# Allegro board BeagleBone-Breadboard-RevA1-allegro.brd
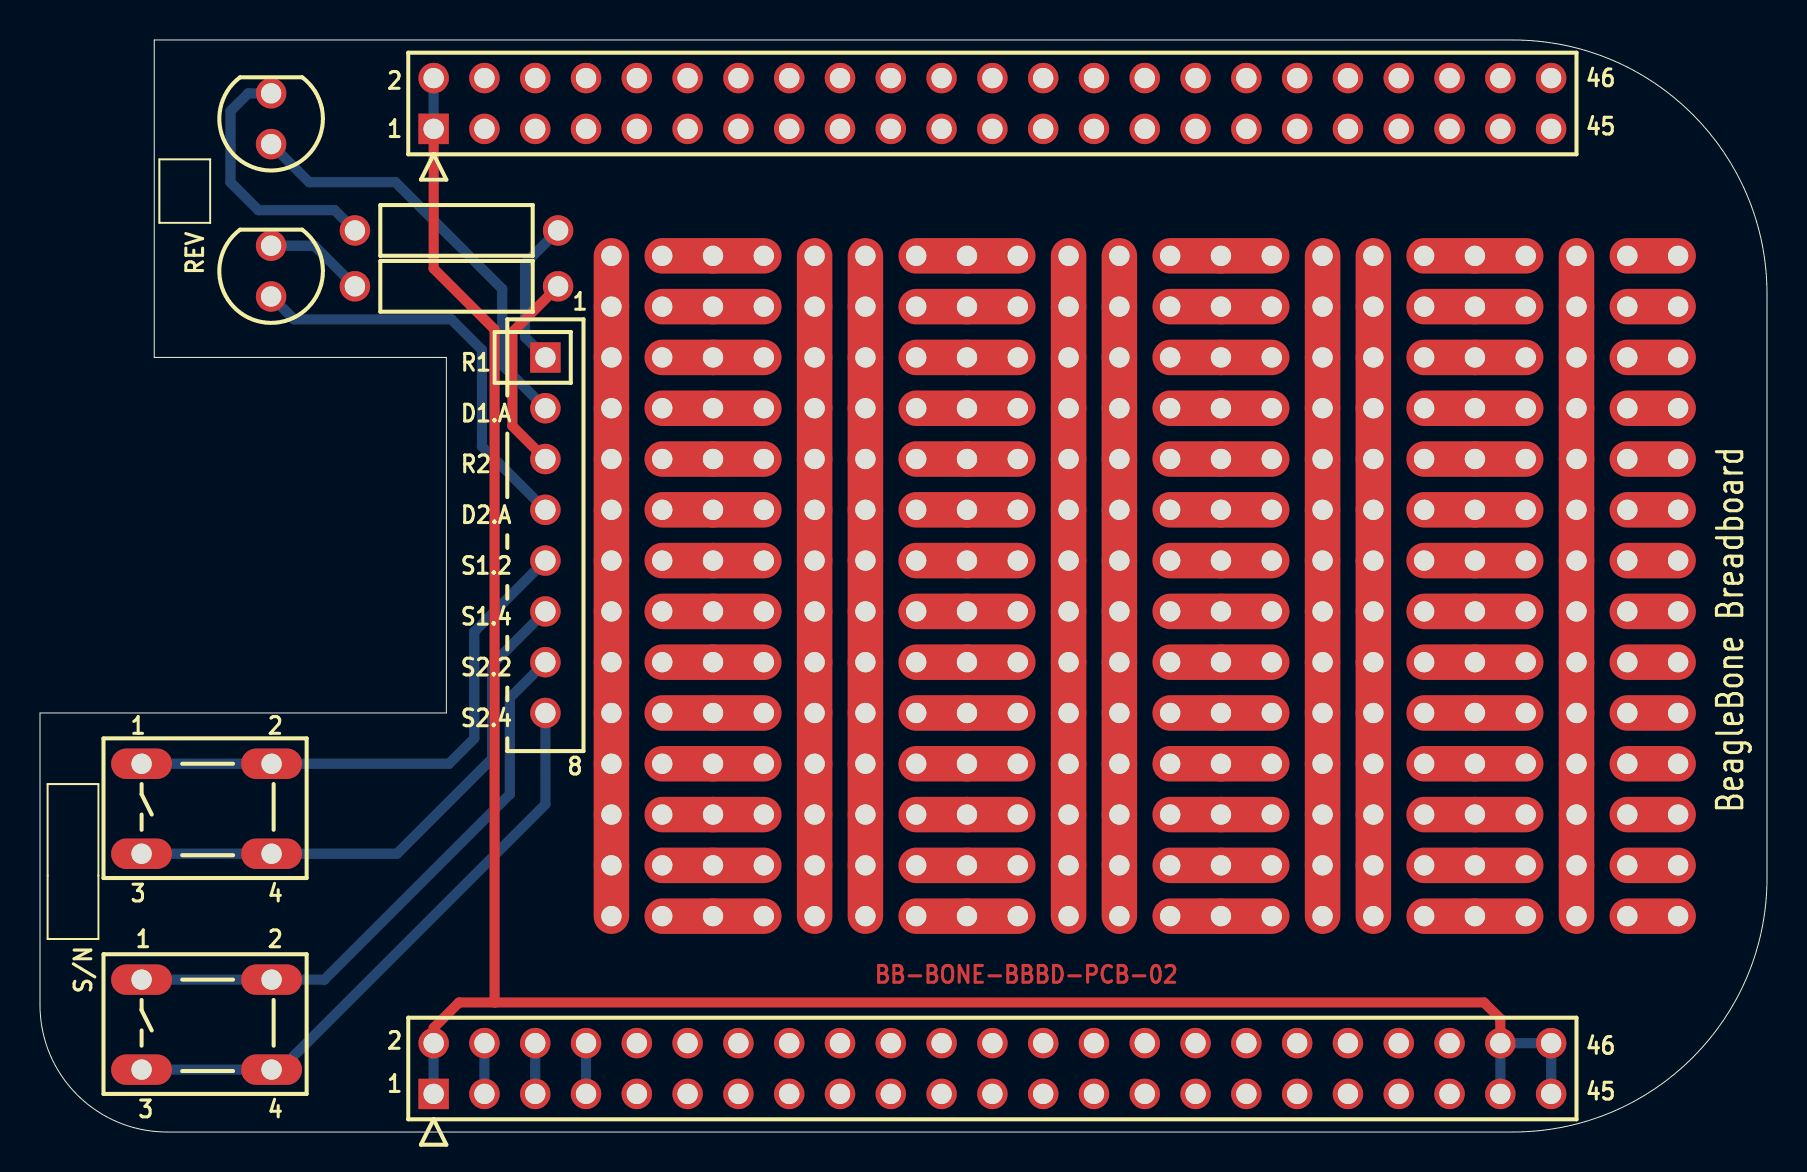
[diagram p0: board, top side]
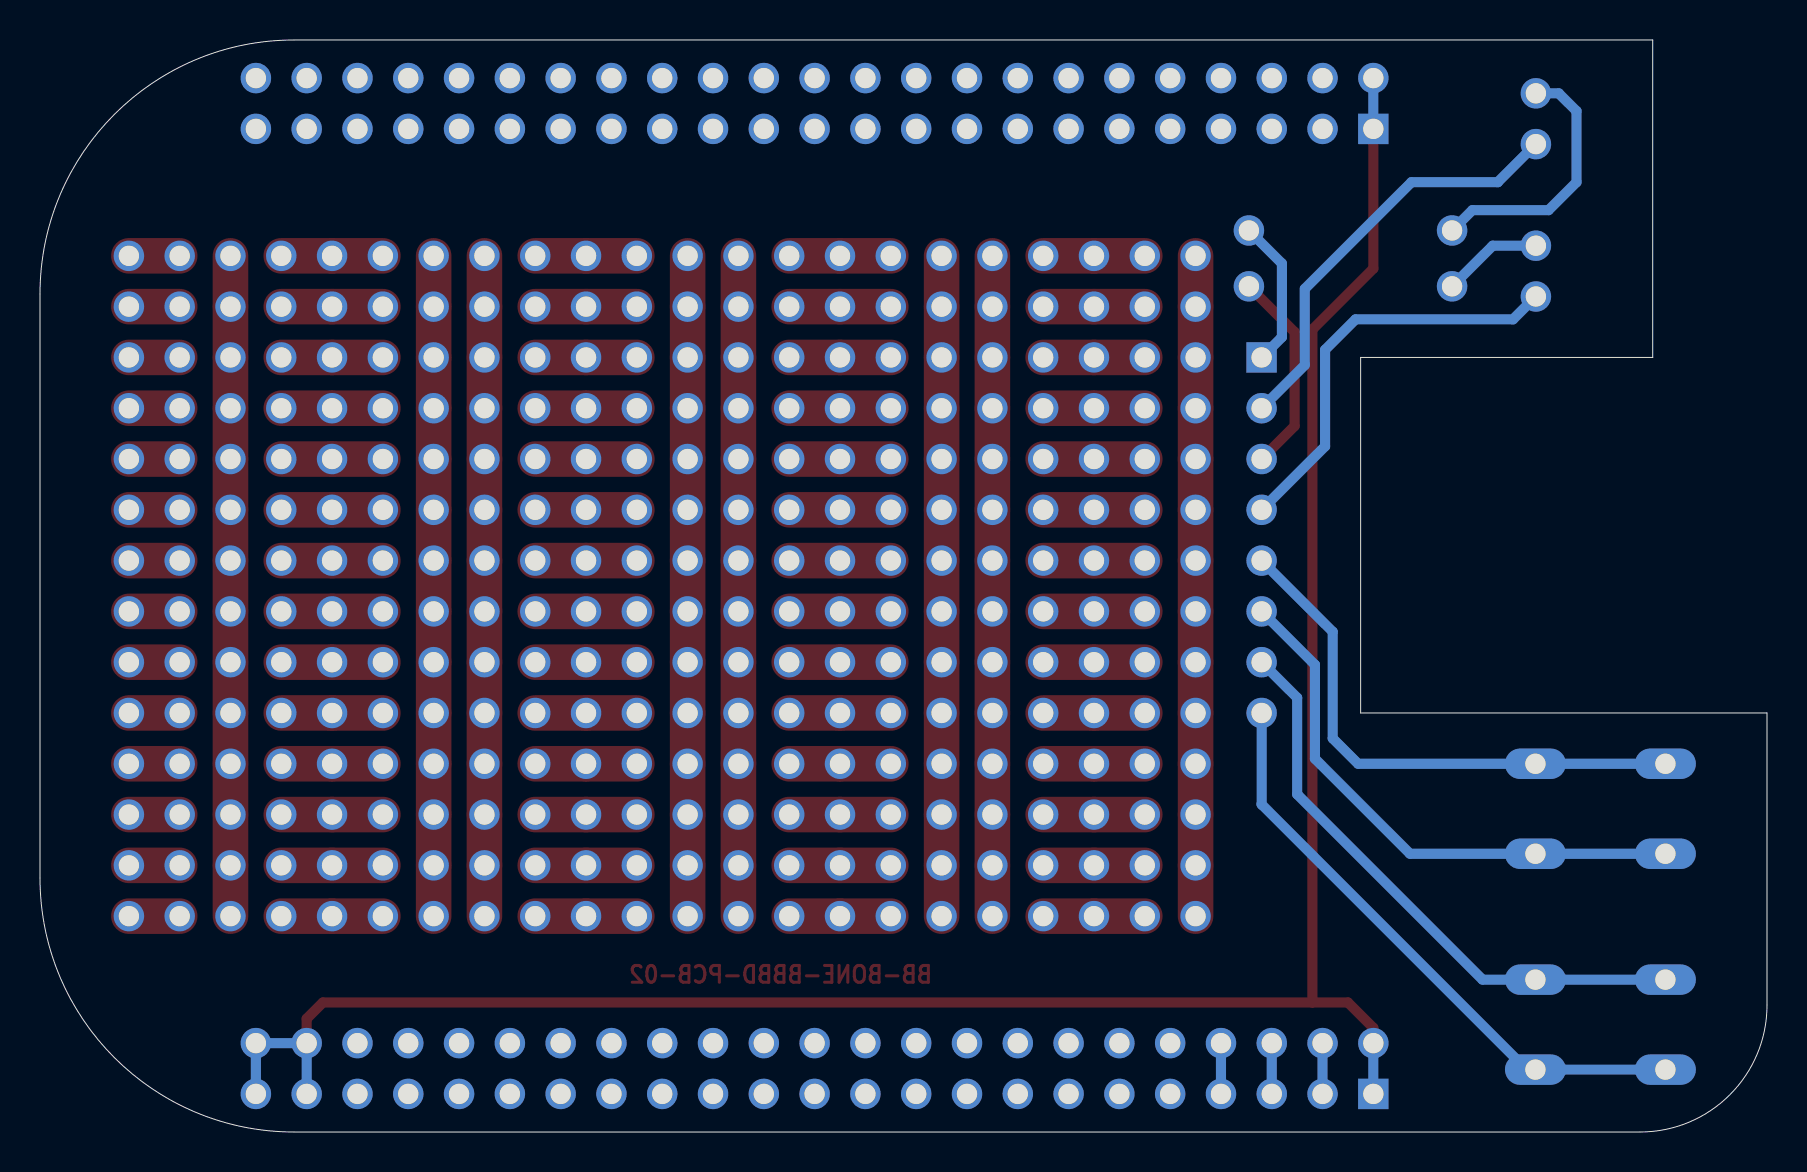
[diagram p1: board, bottom side, seen from below]

Outline 86.36 x 54.61 mm; copper layers: TOP, BOTTOM. Coordinates in mm from the lower left corner of the outline.

## Placement (name value [footprint] x y rotation side)
D1  LED  [LEDS]  11.56 50.67 90 top
D2  LED  [LEDS]  11.56 43.05 90 top
NOREF  -  []  -358.14 -231.14 0 top
NOREF#2  -  []  0 0 0 top
P1  FEMALE HEADER 2x23  [2X23_HDR_FEMALE]  19.68 50.16 180 top
P2  FEMALE HEADER 2x23  [2X23_HDR_FEMALE]  19.68 1.91 180 top
P3  8-PIN HEADER  [8_PIN_HDR_FEMALE]  25.27 38.73 90 top
R1  470  [RESISTOR]  20.83 45.09 180 top
R2  470  [RESISTOR]  20.83 42.29 180 top
S1  SW DIP-2  [BUTTONS]  5.08 18.41 0 top
S2  SW DIP-2  [BUTTONS]  5.08 7.62 0 top
TH1  CONN SOCKET 14x2  [2X14HEADER]  33.66 27.3 0 top
TH2  CONN SOCKET 14x2  [2X14HEADER]  46.35 27.3 0 top
TH3  CONN SOCKET 14x2  [2X14HEADER]  59.05 27.3 0 top
TH4  CONN SOCKET 14x2  [2X14HEADER]  71.75 27.3 0 top
TH5  CONN SOCKET 21x2  [3X14HEADER]  33.66 27.3 0 top
TH6  CONN SOCKET 21x2  [3X14HEADER]  46.35 27.3 0 top
TH7  CONN SOCKET 21x2  [3X14HEADER]  59.05 27.3 0 top
TH8  CONN SOCKET 21x2  [3X14HEADER]  71.75 27.3 0 top
TH9  CONN SOCKET 14  [14HEADER]  79.38 27.3 0 top
TH10  CONN SOCKET 14  [14HEADER]  81.92 27.3 0 top

## Library data of the parts
D1 D2 = LED
P1 P2 = FEMALE HEADER 2x23
P3 = 8-PIN HEADER
R1 R2 = R
S1 S2 = SW DIP-2
TH1-TH4 = CONN SOCKET 14x2
TH5-TH8 = CONN SOCKET 21x2
TH9 TH10 = CONN SOCKET 14

## Footprints (pads in the part's own frame, mm; a bottom-side part is the same pattern mirrored in y, then rotated)
2X14HEADER
  round 1.524 hole 1.016: 1(-5.08,16.51) 2(5.08,16.51) 3(-5.08,13.97) 4(5.08,13.97) 5(-5.08,11.43) 6(5.08,11.43) 7(-5.08,8.89) 8(5.08,8.89) 9(-5.08,6.35) 10(5.08,6.35) 11(-5.08,3.81) 12(5.08,3.81) 13(-5.08,1.27) 14(5.08,1.27) 15(-5.08,-1.27) 16(5.08,-1.27) 17(-5.08,-3.81) 18(5.08,-3.81) 19(-5.08,-6.35) 20(5.08,-6.35) 21(-5.08,-8.89) 22(5.08,-8.89) 23(-5.08,-11.43) 24(5.08,-11.43) 25(-5.08,-13.97) 26(5.08,-13.97) 27(-5.08,-16.51) 28(5.08,-16.51)
2X23_HDR_FEMALE
  rect 1.524x1.524 hole 1.016: 1(0,0)
  round 1.524 hole 1.016: 2(0,-2.54) 3(-2.54,0) 4(-2.54,-2.54) 5(-5.08,0) 6(-5.08,-2.54) 7(-7.62,0) 8(-7.62,-2.54) 9(-10.16,0) 10(-10.16,-2.54) 11(-12.7,0) 12(-12.7,-2.54) 13(-15.24,0) 14(-15.24,-2.54) 15(-17.78,0) 16(-17.78,-2.54) 17(-20.32,0) 18(-20.32,-2.54) 19(-22.86,0) 20(-22.86,-2.54) 21(-25.4,0) 22(-25.4,-2.54) 23(-27.94,0) 24(-27.94,-2.54) 25(-30.48,0) 26(-30.48,-2.54) 27(-33.02,0) 28(-33.02,-2.54) 29(-35.56,0) 30(-35.56,-2.54) 31(-38.1,0) 32(-38.1,-2.54) 33(-40.64,0) 34(-40.64,-2.54) 35(-43.18,0) 36(-43.18,-2.54) 37(-45.72,0) 38(-45.72,-2.54) 39(-48.26,0) 40(-48.26,-2.54) 41(-50.8,0) 42(-50.8,-2.54) 43(-53.34,0) 44(-53.34,-2.54) 45(-55.88,0) 46(-55.88,-2.54)
3X14HEADER
  round 1.524 hole 1.016: 1(-2.54,16.51) 2(0,16.51) 3(2.54,16.51) 4(-2.54,13.97) 5(0,13.97) 6(2.54,13.97) 7(-2.54,11.43) 8(0,11.43) 9(2.54,11.43) 10(-2.54,8.89) 11(0,8.89) 12(2.54,8.89) 13(-2.54,6.35) 14(0,6.35) 15(2.54,6.35) 16(-2.54,3.81) 17(0,3.81) 18(2.54,3.81) 19(-2.54,1.27) 20(0,1.27) 21(2.54,1.27) 22(-2.54,-1.27) 23(0,-1.27) 24(2.54,-1.27) 25(-2.54,-3.81) 26(0,-3.81) 27(2.54,-3.81) 28(-2.54,-6.35) 29(0,-6.35) 30(2.54,-6.35) 31(-2.54,-8.89) 32(0,-8.89) 33(2.54,-8.89) 34(-2.54,-11.43) 35(0,-11.43) 36(2.54,-11.43) 37(-2.54,-13.97) 38(0,-13.97) 39(2.54,-13.97) 40(-2.54,-16.51) 41(0,-16.51) 42(2.54,-16.51)
8_PIN_HDR_FEMALE
  rect 1.524x1.524 hole 1.016: 1(0,0)
  round 1.524 hole 1.016: 2(-2.54,0) 3(-5.08,0) 4(-7.62,0) 5(-10.16,0) 6(-12.7,0) 7(-15.24,0) 8(-17.78,0)
14HEADER
  round 1.524 hole 1.016: 1(0,16.51) 2(0,13.97) 3(0,11.43) 4(0,8.89) 5(0,6.35) 6(0,3.81) 7(0,1.27) 8(0,-1.27) 9(0,-3.81) 10(0,-6.35) 11(0,-8.89) 12(0,-11.43) 13(0,-13.97) 14(0,-16.51)
BUTTONS
  oval 3.048x1.524 hole 1.016: 1(0,0) 2(6.5,0) 3(0,-4.5) 4(6.5,-4.5)
LEDS
  round 1.524 hole 1.016: 1(-1.27,0) 2(1.27,0)
RESISTOR
  round 1.524 hole 1.016: 1(-5.08,0) 2(5.08,0)

## Nets
AGND: P2.34
DGND: P1.1 P1.2 P2.1 P2.2 P2.43 P2.44 P2.45 P2.46
VDD_3V3EXP: P2.3 P2.4
VDD_5V: P2.5 P2.6
VDD_ADC: P2.32
AIN0: P2.39
AIN1: P2.40
AIN2: P2.37
AIN3: P2.38
AIN4: P2.33
AIN5: P2.36
AIN6: P2.35
CLKOUT2: P2.41
EHRPWM1A: P2.14
EHRPWM1B: P2.16
EHRPWM2A: P1.19
EHRPWM2B: P1.13
GPIO0_7: P2.42
GPIO1_0: P1.25
GPIO1_1: P1.24
GPIO1_2: P1.5
GPIO1_3: P1.6
GPIO1_4: P1.23
GPIO1_5: P1.22
GPIO1_6: P1.3
GPIO1_7: P1.4
GPIO1_12: P1.12
GPIO1_13: P1.11
GPIO1_14: P1.16
GPIO1_15: P1.15
GPIO1_26: P1.14
GPIO1_27: P1.17
GPIO1_28: P2.12
GPIO1_29: P1.26
GPIO1_30: P1.21
GPIO1_31: P1.20
GPIO2_1: P1.18
GPIO2_6: P1.45
GPIO2_7: P1.46
GPIO2_8: P1.43
GPIO2_9: P1.44
GPIO2_10: P1.41
GPIO2_11: P1.42
GPIO2_13: P1.40
GPIO2_22: P1.27
GPIO2_23: P1.29
GPIO2_24: P1.28
GPIO2_25: P1.30
GPIO3_19: P2.27
GPIO3_21: P2.25
GPIO_12: P1.39
I2C1_SCL: P2.17
I2C1_SDA: P2.18
I2C2_SCL: P2.19
I2C2_SDA: P2.20
N$40: P1.38
PWR_BUT: P2.9
SPI1_CS0: P2.28
SPI1_D0: P2.29
SPI1_D1: P2.30
SPI1_SCLK: P2.31
SYS_5V: P2.7 P2.8
SYS_RESETN: P2.10
TIMER4: P1.7
TIMER5: P1.9
TIMER6: P1.10
TIMER7: P1.8
UART1_RXD: P2.26
UART1_TXD: P2.24
UART2_RXD: P2.22
UART2_TXD: P2.21
UART3_CTSN: P1.36
UART3_RTSN: P1.34
UART3_RXD: P2.15
UART3_TXD: P2.23
UART4_CTSN: P1.35
UART4_RTSN: P1.33
UART4_RXD: P2.11
UART4_TXD: P2.13
UART5_CTSN: P1.31
UART5_RTSN: P1.32
UART5_TXD: P1.37
N17763164: P3.1 R1.1
N17763549: D1.2(CATHODE) R1.2
N17763744: D1.1(ANODE) P3.2
N17764739: P3.3 R2.1
N17765148: D2.2(CATHODE) R2.2
N17765355: D2.1(ANODE) P3.4
N17766867: P3.5 S1.1(A1) S1.2(A2)
N17767733: P3.6 S1.3(B2) S1.4(B1)
N17770742: P3.8 S2.3(B2) S2.4(B1)
N17770970: P3.7 S2.1(A1) S2.2(A2)
N17781378: TH1.1 TH1.3(2) TH1.5(3) TH1.7(4) TH1.9(5) TH1.11(6) TH1.13(7) TH1.15(8) TH1.17(9) TH1.19(10) TH1.21(11) TH1.23(12) TH1.25(13) TH1.27(14)
N17785215: TH1.2(15) TH1.4(16) TH1.6(17) TH1.8(18) TH1.10(19) TH1.12(20) TH1.14(21) TH1.16(22) TH1.18(23) TH1.20(24) TH1.22(25) TH1.24(26) TH1.26(27) TH1.28
N17790580: TH3.2(15) TH3.4(16) TH3.6(17) TH3.8(18) TH3.10(19) TH3.12(20) TH3.14(21) TH3.16(22) TH3.18(23) TH3.20(24) TH3.22(25) TH3.24(26) TH3.26(27) TH3.28
N17790634: TH3.1 TH3.3(2) TH3.5(3) TH3.7(4) TH3.9(5) TH3.11(6) TH3.13(7) TH3.15(8) TH3.17(9) TH3.19(10) TH3.21(11) TH3.23(12) TH3.25(13) TH3.27(14)
N17791201: TH2.2(15) TH2.4(16) TH2.6(17) TH2.8(18) TH2.10(19) TH2.12(20) TH2.14(21) TH2.16(22) TH2.18(23) TH2.20(24) TH2.22(25) TH2.24(26) TH2.26(27) TH2.28
N17791255: TH2.1 TH2.3(2) TH2.5(3) TH2.7(4) TH2.9(5) TH2.11(6) TH2.13(7) TH2.15(8) TH2.17(9) TH2.19(10) TH2.21(11) TH2.23(12) TH2.25(13) TH2.27(14)
N17791878: TH4.2(15) TH4.4(16) TH4.6(17) TH4.8(18) TH4.10(19) TH4.12(20) TH4.14(21) TH4.16(22) TH4.18(23) TH4.20(24) TH4.22(25) TH4.24(26) TH4.26(27) TH4.28
N17791932: TH4.1 TH4.3(2) TH4.5(3) TH4.7(4) TH4.9(5) TH4.11(6) TH4.13(7) TH4.15(8) TH4.17(9) TH4.19(10) TH4.21(11) TH4.23(12) TH4.25(13) TH4.27(14)
N17792911: TH5.1 TH5.2 TH5.3
N17794334: TH5.4 TH5.5 TH5.6
N17794834: TH5.7 TH5.8 TH5.9
N17795340: TH5.10 TH5.11 TH5.12
N17795852: TH5.13 TH5.14 TH5.15
N17796370: TH5.16 TH5.17 TH5.18
N17796894: TH5.19 TH5.20 TH5.21
N17797408: TH5.40 TH5.41 TH5.42
N17798957: TH5.37 TH5.38 TH5.39
N17799499: TH5.34 TH5.35 TH5.36
N17802057: TH5.31 TH5.32 TH5.33
N17802061: TH5.28 TH5.29 TH5.30
N17802071: TH5.25 TH5.26 TH5.27
N17803192: TH5.22 TH5.23 TH5.24
N17803960: TH6.40 TH6.41 TH6.42
N17803964: TH6.37 TH6.38 TH6.39
N17803974: TH6.34 TH6.35 TH6.36
N17803984: TH6.31 TH6.32 TH6.33
N17803988: TH6.28 TH6.29 TH6.30
N17803998: TH6.25 TH6.26 TH6.27
N17804014: TH6.22 TH6.23 TH6.24
N17804024: TH6.1 TH6.2 TH6.3
N17804034: TH6.4 TH6.5 TH6.6
N17804044: TH6.7 TH6.8 TH6.9
N17804054: TH6.10 TH6.11 TH6.12
N17804064: TH6.13 TH6.14 TH6.15
N17804074: TH6.16 TH6.17 TH6.18
N17804084: TH6.19 TH6.20 TH6.21
N17804942: TH7.40 TH7.41 TH7.42
N17804946: TH7.37 TH7.38 TH7.39
N17804956: TH7.34 TH7.35 TH7.36
N17804966: TH7.31 TH7.32 TH7.33
N17804970: TH7.28 TH7.29 TH7.30
N17804980: TH7.25 TH7.26 TH7.27
N17804996: TH7.22 TH7.23 TH7.24
N17805006: TH7.1 TH7.2 TH7.3
N17805016: TH7.4 TH7.5 TH7.6
N17805026: TH7.7 TH7.8 TH7.9
N17805036: TH7.10 TH7.11 TH7.12
N17805046: TH7.13 TH7.14 TH7.15
N17805056: TH7.16 TH7.17 TH7.18
N17805066: TH7.19 TH7.20 TH7.21
N17806008: TH8.40 TH8.41 TH8.42
N17806012: TH8.37 TH8.38 TH8.39
N17806022: TH8.34 TH8.35 TH8.36
N17806032: TH8.31 TH8.32 TH8.33
N17806036: TH8.28 TH8.29 TH8.30
N17806046: TH8.25 TH8.26 TH8.27
N17806062: TH8.22 TH8.23 TH8.24
N17806072: TH8.1 TH8.2 TH8.3
N17806082: TH8.4 TH8.5 TH8.6
N17806092: TH8.7 TH8.8 TH8.9
N17806102: TH8.10 TH8.11 TH8.12
N17806112: TH8.13 TH8.14 TH8.15
N17806122: TH8.16 TH8.17 TH8.18
N17806132: TH8.19 TH8.20 TH8.21
N18045051: TH9.1 TH10.1
N18045848: TH9.2 TH10.2
N18047612: TH9.3 TH10.3
N18051781: TH9.4 TH10.4
N18052584: TH9.5 TH10.5
N18053389: TH9.6 TH10.6
N18054196: TH9.7 TH10.7
N18055005: TH9.8 TH10.8
N18055816: TH9.9 TH10.9
N18056629: TH9.10 TH10.10
N18057444: TH9.11 TH10.11
N18058261: TH9.12 TH10.12
N18059080: TH9.13 TH10.13
N18059901: TH9.14 TH10.14

## Routing (per net, layer and track width the routed paths; a pad name or vN(x,y) marks a point on that pad's centre or on a via; arc(x,y) is an arc through that point)
DGND: length 113.8
  TOP w0.508: P1.1 19.68,43.18 22.73,40.13 22.73,6.48 ; P2.44 73.03,5.66 72.21,6.48 22.73,6.48 ; 22.73,6.48 20.95,6.48 19.68,5.21 P2.2
  BOTTOM w0.508: P1.2 P1.1 ; P2.43 P2.44 P2.46 P2.45 ; P2.1 P2.2
VDD_3V3EXP: length 2.5
  BOTTOM w0.508: P2.4 P2.3
VDD_5V: length 2.5
  BOTTOM w0.508: P2.6 P2.5
SYS_5V: length 2.5
  BOTTOM w0.508: P2.8 P2.7
N17763164: length 7.5
  BOTTOM w0.508: R1.1 24.26,43.43 24.26,39.75 P3.1
N17763549: length 13.2
  BOTTOM w0.508: R1.2 14.73,46.1 10.92,46.1 9.53,47.5 9.53,51.05 10.41,51.94 D1.2
N17763744: length 21.4
  BOTTOM w0.508: P3.2 23.11,38.35 23.11,42.16 17.78,47.5 13.46,47.5 D1.1
N17764739: length 10.3
  TOP w0.508: R2.1 23.62,40.01 23.62,35.31 P3.3
N17765148: length 5
  BOTTOM w0.508: R2.2 13.72,44.32 D2.2
N17765355: length 21
  BOTTOM w0.508: P3.4 22.1,34.29 22.1,39.12 20.57,40.64 12.7,40.64 11.56,41.78
N17766867: length 27.5
  BOTTOM w0.508: S1.1 S1.2 20.45,18.41 21.72,19.68 21.72,25.02 P3.5
N17767733: length 28
  BOTTOM w0.508: S1.3 S1.4 17.85,13.91 22.61,18.67 22.61,23.37 P3.6
N17770742: length 30.3
  BOTTOM w0.508: P3.8 25.27,16.38 12.01,3.12 S2.4 S2.3
N17770970: length 29.6
  BOTTOM w0.508: S2.1 S2.2 14.22,7.62 23.5,16.89 23.5,21.72 25.27,23.5
N17781378: length 33
  TOP w1.778: TH1.1 TH1.3 TH1.5 TH1.7 TH1.9 TH1.11 TH1.13 TH1.15 TH1.17 TH1.19 TH1.21 TH1.23 28.57,10.79
N17785215: length 33
  TOP w1.778: TH1.2 TH1.4 TH1.6 TH1.8 TH1.10 TH1.12 TH1.14 TH1.16 TH1.18 TH1.20 TH1.22 TH1.24 38.73,10.79
N17790580: length 33
  TOP w1.778: TH3.2 TH3.4 TH3.6 TH3.8 TH3.10 TH3.12 TH3.14 TH3.16 TH3.18 TH3.20 TH3.22 TH3.24 64.14,10.79
N17790634: length 33
  TOP w1.778: 53.98,10.79 TH3.23 TH3.21 TH3.19 TH3.17 TH3.15 TH3.13 TH3.11 TH3.9 TH3.7 TH3.5 TH3.3 TH3.1
N17791201: length 33
  TOP w1.778: 51.44,10.79 51.44,43.81
N17791255: length 33
  TOP w1.778: TH2.1 TH2.3 TH2.5 TH2.7 TH2.9 TH2.11 TH2.13 TH2.15 TH2.17 TH2.19 TH2.21 TH2.23 41.27,10.79
N17791878: length 33
  TOP w1.778: 76.83,10.79 TH4.24 TH4.22 TH4.20 TH4.18 TH4.16 TH4.14 TH4.12 TH4.10 TH4.8 TH4.6 TH4.4 TH4.2
N17791932: length 33
  TOP w1.778: 66.67,10.79 TH4.23 TH4.21 TH4.19 TH4.17 TH4.15 TH4.13 TH4.11 TH4.9 TH4.7 TH4.5 TH4.3 TH4.1
N17792911: length 5.1
  TOP w1.778: TH5.3 TH5.2 TH5.1
N17794334: length 5.1
  TOP w1.778: TH5.6 TH5.5 TH5.4
N17794834: length 5.1
  TOP w1.778: TH5.7 TH5.8 TH5.9
N17795340: length 5.1
  TOP w1.778: TH5.10 TH5.11 TH5.12
N17795852: length 5.1
  TOP w1.778: TH5.13 TH5.14 TH5.15
N17796370: length 5.1
  TOP w1.778: TH5.18 TH5.17 TH5.16
N17796894: length 5.1
  TOP w1.778: TH5.19 TH5.20 TH5.21
N17797408: length 5.1
  TOP w1.778: 31.11,10.79 36.2,10.79
N17798957: length 5.1
  TOP w1.778: 36.2,13.34 31.11,13.34
N17799499: length 5.1
  TOP w1.778: TH5.36 TH5.35 TH5.34
N17802057: length 5.1
  TOP w1.778: TH5.31 TH5.32 TH5.33
N17802061: length 5.1
  TOP w1.778: TH5.28 TH5.29 TH5.30
N17802071: length 5.1
  TOP w1.778: TH5.25 TH5.26 TH5.27
N17803192: length 5.1
  TOP w1.778: TH5.22 TH5.23 TH5.24
N17803960: length 5.1
  TOP w1.778: 43.81,10.79 48.9,10.79
N17803964: length 5.1
  TOP w1.778: 43.81,13.34 48.9,13.34
N17803974: length 5.1
  TOP w1.778: TH6.34 TH6.35 48.9,15.88
N17803984: length 5.1
  TOP w1.778: TH6.31 TH6.32 48.9,18.41
N17803988: length 5.1
  TOP w1.778: TH6.28 TH6.29 48.9,20.95
N17803998: length 5.1
  TOP w1.778: TH6.25 TH6.26 48.9,23.5
N17804014: length 5.1
  TOP w1.778: TH6.22 TH6.23 48.9,26.04
N17804024: length 5.1
  TOP w1.778: TH6.1 TH6.2 48.9,43.81
N17804034: length 5.1
  TOP w1.778: TH6.4 TH6.5 48.9,41.27
N17804044: length 5.1
  TOP w1.778: 48.9,38.73 TH6.8 TH6.7
N17804054: length 5.1
  TOP w1.778: 48.9,36.2 TH6.11 TH6.10
N17804064: length 5.1
  TOP w1.778: 48.9,33.66 TH6.14 TH6.13
N17804074: length 5.1
  TOP w1.778: 48.9,31.11 TH6.17 TH6.16
N17804084: length 5.1
  TOP w1.778: TH6.19 TH6.20 48.9,28.57
N17804942: length 5.1
  TOP w1.778: 61.59,10.79 56.52,10.79
N17804946: length 5.1
  TOP w1.778: 61.59,13.34 56.52,13.34
N17804956: length 5.1
  TOP w1.778: TH7.34 TH7.35 TH7.36
N17804966: length 5.1
  TOP w1.778: TH7.31 TH7.32 TH7.33
N17804970: length 5.1
  TOP w1.778: TH7.30 TH7.29 TH7.28
N17804980: length 5.1
  TOP w1.778: TH7.25 TH7.26 TH7.27
N17804996: length 5.1
  TOP w1.778: TH7.24 TH7.23 TH7.22
N17805006: length 5.1
  TOP w1.778: TH7.3 TH7.2 TH7.1
N17805016: length 5.1
  TOP w1.778: TH7.4 TH7.5 TH7.6
N17805026: length 5.1
  TOP w1.778: TH7.9 TH7.8 TH7.7
N17805036: length 5.1
  TOP w1.778: TH7.12 TH7.11 TH7.10
N17805046: length 5.1
  TOP w1.778: TH7.13 TH7.14 TH7.15
N17805056: length 5.1
  TOP w1.778: TH7.18 TH7.17 TH7.16
N17805066: length 5.1
  TOP w1.778: TH7.19 TH7.20 TH7.21
N17806008: length 5.1
  TOP w1.778: 69.22,10.79 74.3,10.79
N17806012: length 5.1
  TOP w1.778: 69.22,13.34 74.3,13.34
N17806022: length 5.1
  TOP w1.778: 69.22,15.88 TH8.35 TH8.36
N17806032: length 5.1
  TOP w1.778: 69.22,18.41 TH8.32 TH8.33
N17806036: length 5.1
  TOP w1.778: 69.22,20.95 TH8.29 TH8.30
N17806046: length 5.1
  TOP w1.778: TH8.27 TH8.26 69.22,23.5
N17806062: length 5.1
  TOP w1.778: 69.22,26.04 TH8.23 TH8.24
N17806072: length 5.1
  TOP w1.778: 69.22,43.81 TH8.2 TH8.3
N17806082: length 5.1
  TOP w1.778: TH8.6 TH8.5 69.22,41.27
N17806092: length 5.1
  TOP w1.778: TH8.9 TH8.8 69.22,38.73
N17806102: length 5.1
  TOP w1.778: TH8.12 TH8.11 69.22,36.2
N17806112: length 5.1
  TOP w1.778: TH8.15 TH8.14 69.22,33.66
N17806122: length 5.1
  TOP w1.778: 69.22,31.11 TH8.17 TH8.18
N17806132: length 5.1
  TOP w1.778: 69.22,28.57 TH8.20 TH8.21
N18045051: length 2.5
  TOP w1.778: TH9.1 TH10.1
N18045848: length 2.5
  TOP w1.778: TH9.2 TH10.2
N18047612: length 2.5
  TOP w1.778: TH9.3 TH10.3
N18051781: length 2.5
  TOP w1.778: TH9.4 TH10.4
N18052584: length 2.5
  TOP w1.778: TH9.5 TH10.5
N18053389: length 2.5
  TOP w1.778: TH9.6 TH10.6
N18054196: length 2.5
  TOP w1.778: TH9.7 TH10.7
N18055005: length 2.5
  TOP w1.778: TH9.8 TH10.8
N18055816: length 2.5
  TOP w1.778: TH9.9 TH10.9
N18056629: length 2.5
  TOP w1.778: TH9.10 TH10.10
N18057444: length 2.5
  TOP w1.778: TH9.11 TH10.11
N18058261: length 2.5
  TOP w1.778: TH9.12 TH10.12
N18059080: length 2.5
  TOP w1.778: 79.38,13.34 81.92,13.34
N18059901: length 2.5
  TOP w1.778: 79.38,10.79 81.92,10.79

## Text on the board
User.Comments: EMAIL: info@pcbvn.com | WEBSITE : www.pcbvn.com | MOBILE : +84908222784 | nampth@yahoo.com | DATE: | CIRCUITCO ELECTRONICS | 03/11/2011 | BONE BREADBOARD | PCB VIET NAM
TOP: BB-BONE-BBBD-PCB-02
Ref Des/Silkscreen Top: R1 | D1.A | R2 | D2.A | S1.2 | S1.4 | S2.2 | S2.4 | S/N | REV | BeagleBone Breadboard
PAGE_OUTLINE: FAB | 1   TOTAL BOARD THICKNESS SHALL BE .062 +/- 10% INCHES. | 5.  APPLY LPI SILKSCREEN OR EQUIVALENT PER THE ARTWORK COLOR:BLACK. | 4.  SOLDERMASK ON BOTH SIDES OF THE BOARD SHALL BE S.M.O.B.C., LPI, COLOR WHITE. | 3.  MINIMUM TRACE AND SPACE SHALL BE .005 OF AN INCH. | 2.  COPPER PLATED SURFACE CONDUCTORS SHALL BE THE EQUIVALENT OF 1 OZ. COPPER | 8.  FINISHED BOARD SHALL BE FREE OF BURRS ON EDGES. | 7.  DRC'S MUST BE RAN ON THE GERBERS BEFORE BUILDING BOARDS UNLESS PRIOR | 6.  PLATED THRU HOLE SIZE TOLERANCES SHALL BE +/- .003 INCH. | 9.  SURFACE FINISH SHALL BE IMMERSION SILVER. | AFTER PLATING.  PLANE LAYERS SHALL BE 1 OZ. COPPER.  AVERAGE COPPER ON | THE WALL OF THE PLATED HOLE SHALL BE PER IPC CLASS 2. | ALL MATERIAL SHALL BE NEMA GRADE FR-4 OR EQUIVALENT. (Tg>=170 DEG. C) | APPROVAL IS GIVEN IN WRITING. | UNPLATED THRU HOLE SIZE TOLERANCES SHALL BE +/- .002 INCH. | LAYER SCHEDULE | SMASK_TOP | SMASK_BOT | SCALE: NONE | SILK_TOP | LAYER 1 | LAYER 2 | BONE BREADBOARD | CIRCUITCO ELECTRONICS | NOTES: UNLESS OTHERWISE SPECIFIED
DIMENSION: ASSY_TOP
ASSY_BOT: ASSY_BOT
LAYER1_TOP: LAYER1_TOP
User.5: LAYER2_BOT
User.6: PMASK_TOP
User.7: PMASK_BOT
User.8: SMASK_TOP
User.9: SMASK_BOT
User.10: SILK_TOP
User.11: SILK_BOT
User.13: FIGURE | SIZE | 40.0 | DRILL CHART: TOP to BOTTOM | ALL UNITS ARE IN MILS | PLATED | QTY | 308 | 8 | 108
